# Altium PCB Relay_SW.PcbDoc
Units mm, origin at the board's own origin, x right, y up, seen from the top; angles counter-clockwise.
Board outline 139.45 x 113.98 mm, 2 copper layers (Top Layer, Bottom Layer); 60 components, 69 nets, 263 pads, 25 vias.
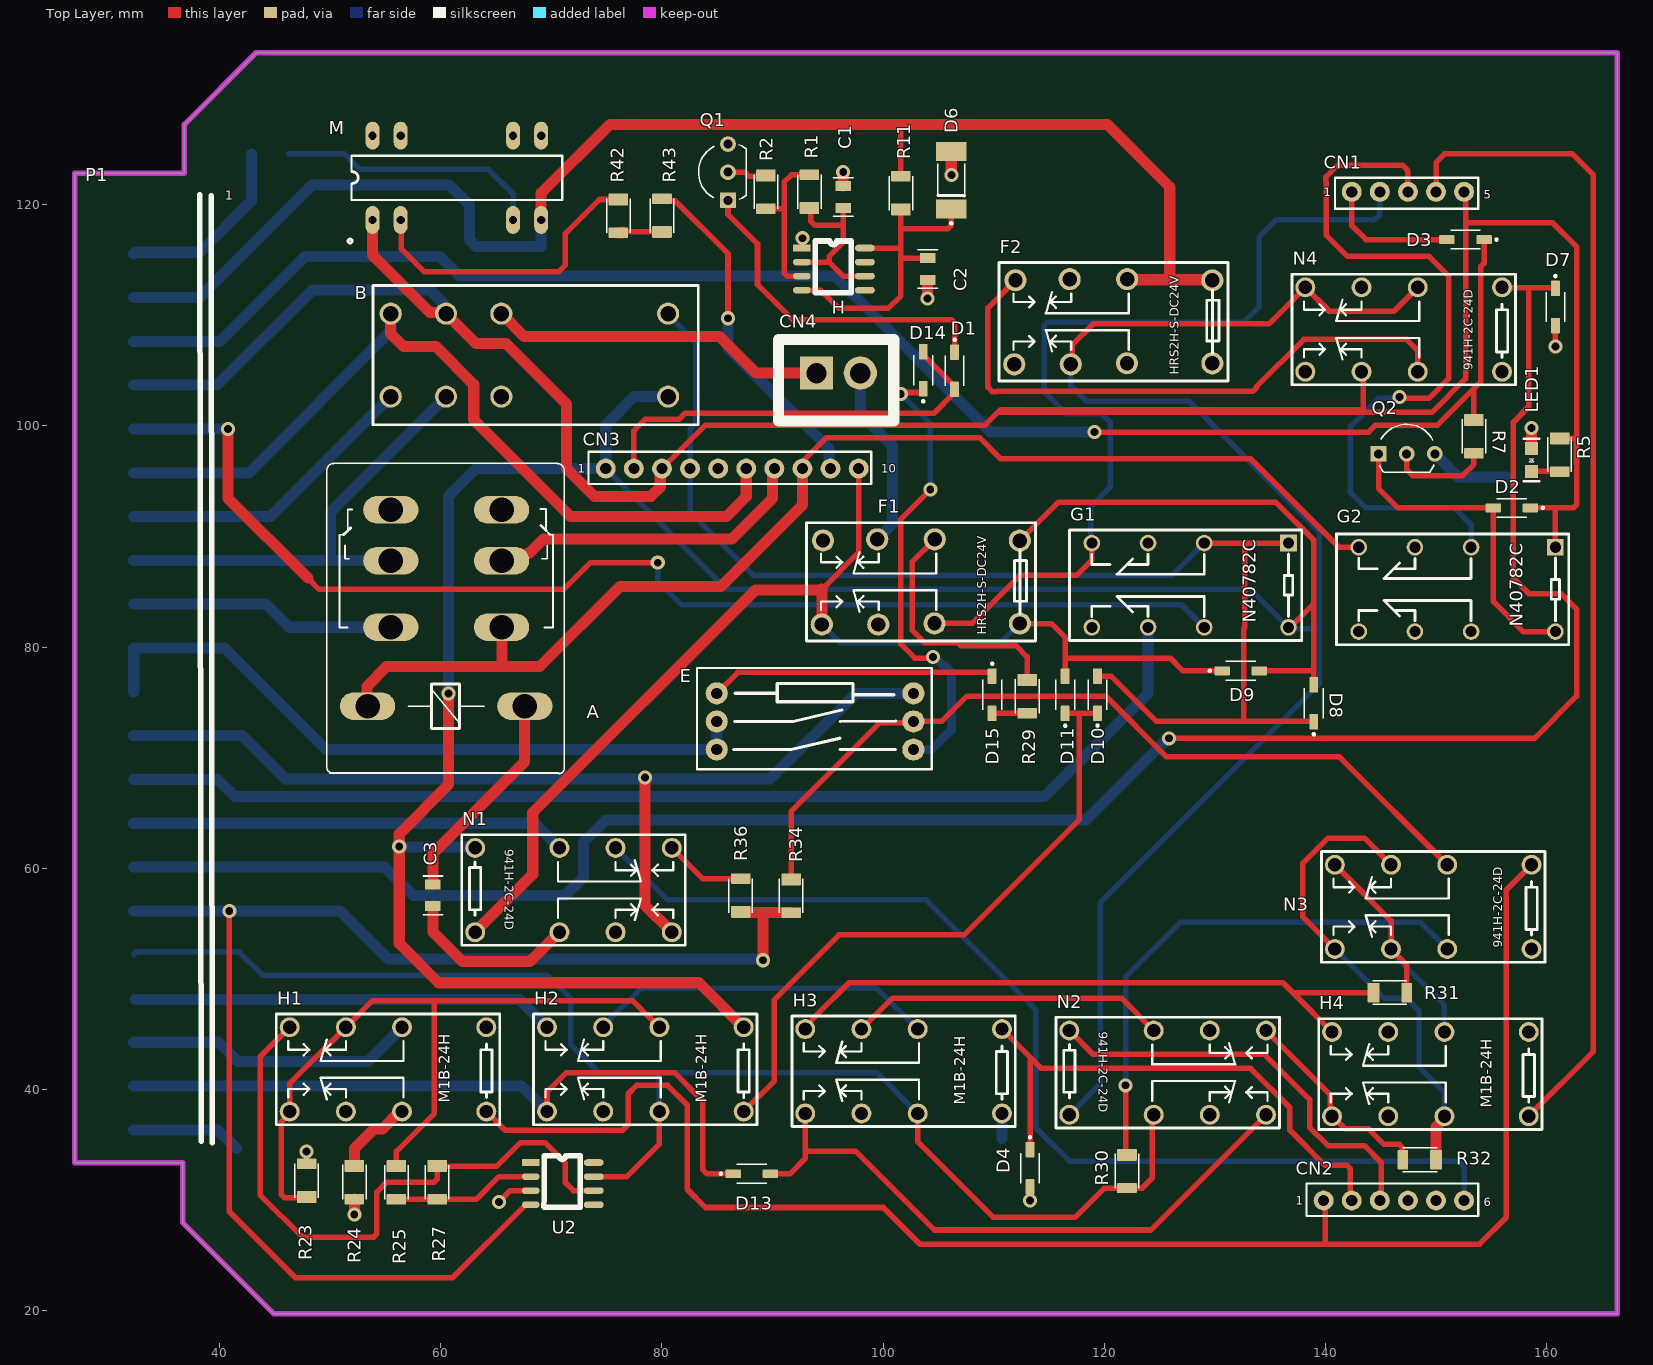
[diagram p0: Top Layer view]
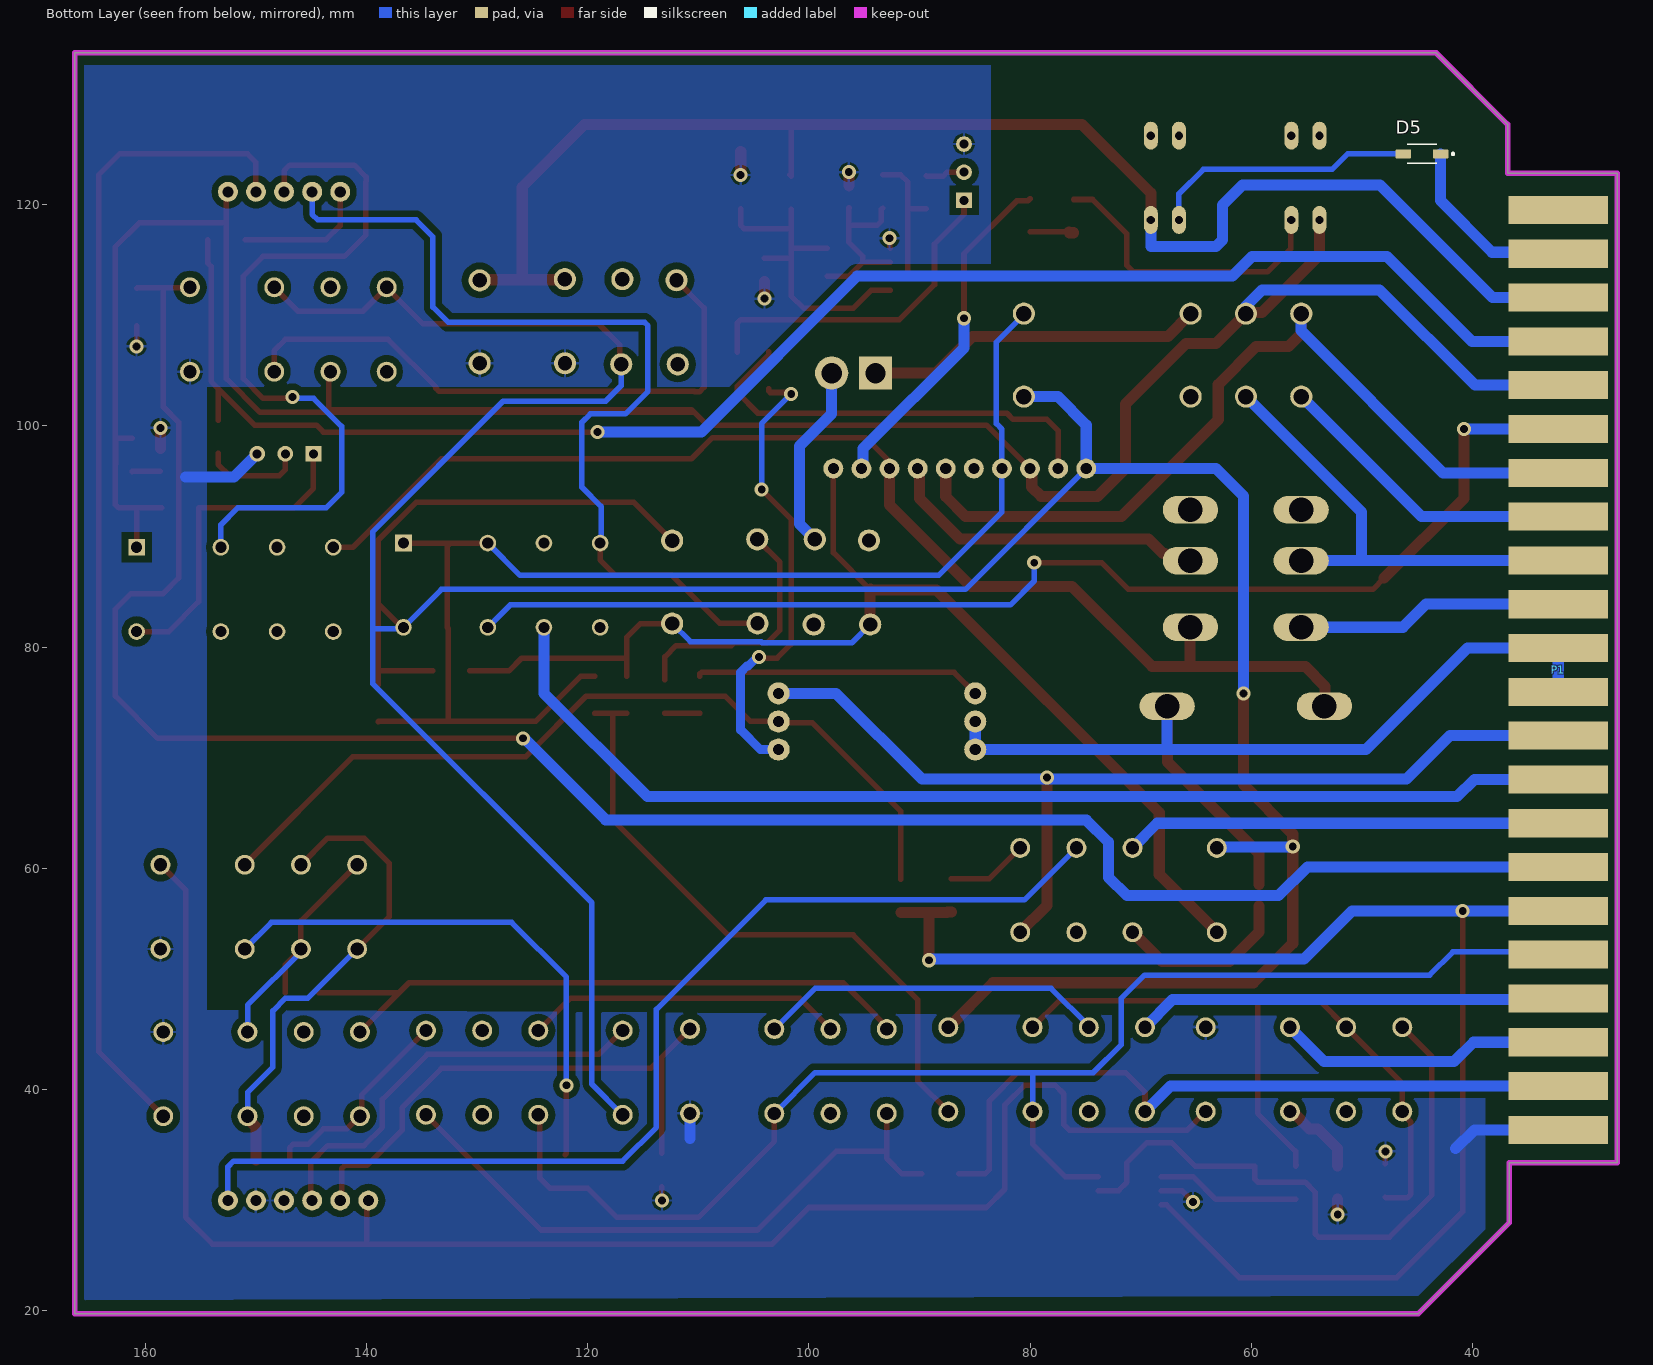
[diagram p1: Bottom Layer view, seen from below]
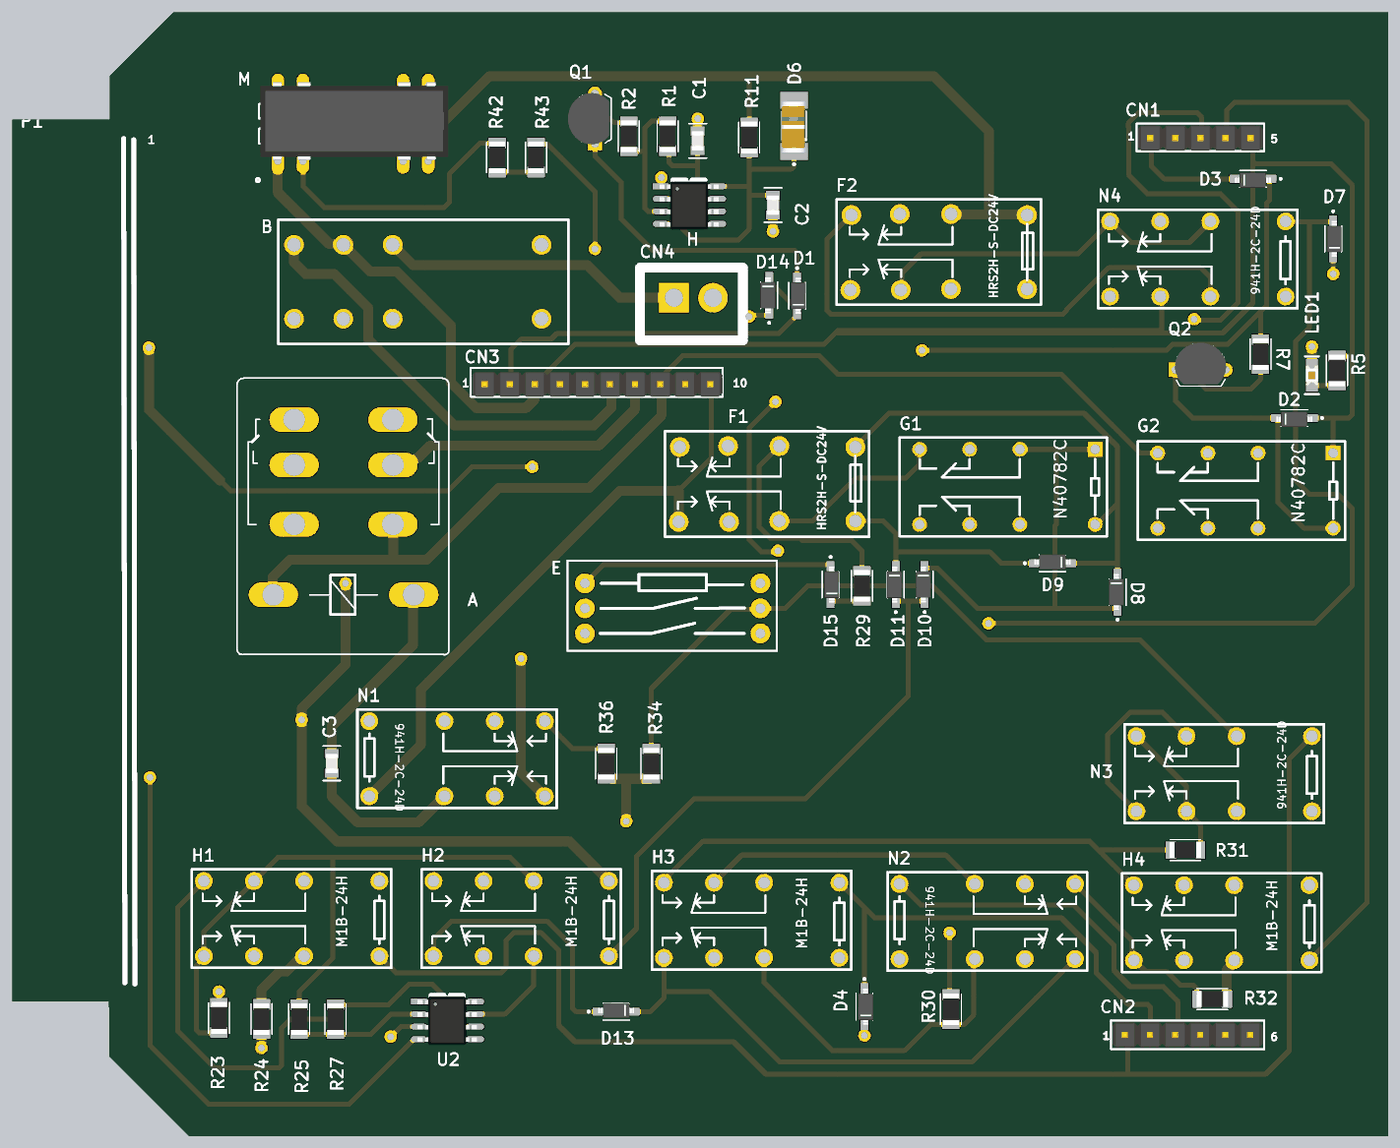
[diagram p2: 3D render of the assembled board from above, using the file's embedded part models]

## Layer stack, top to bottom
Top Solder: solder mask 0.0102, Solder Resist, Dk 3.5
Top Layer: signal copper 0.0356
Dielectric 1: dielectric 0.32, FR-4, Dk 4.8
Bottom Layer: signal copper 0.0356
Bottom Solder: solder mask 0.0102, Solder Resist, Dk 3.5

## Board outline
26.924,33.401 26.924,122.828 36.83,122.828 36.83,127.254 43.307,133.731 166.37,133.731 166.37,19.749 44.894,19.749 36.703,27.94 36.703,33.401

## Design rules (kind name [scope] priority, off if disabled: settings)
Clearance Clearance_2 [InNamedPolygon('GND_L02_P000')] p1: gap=0.6 ignorepadtopadclearanceinfootprint=FALSE
Clearance Clearance_1 [InNamedPolygon('GND_L02_P000')] p2: gap=0.254 ignorepadtopadclearanceinfootprint=FALSE except(0: Arc-Hole Track-Hole SMDPad-Hole THPad-Hole Via-Hole Fill-Hole Poly-Hole Region-Hole Text-Hole; 0.5: Arc-Arc Arc-Track Track-Track)
Clearance [All] p3: gap=0.4 ignorepadtopadclearanceinfootprint=FALSE
PolygonConnect [All] p1: connectstyle=Relief reliefconductorwidth=0.254 reliefentries=4 polygonreliefangle="90 Angle" airgapwidth=0.254
RoutingVias [All] p1: holewidth=0.711 width=1.27 viastyle="Through Hole" minholewidth=0.711 minwidth=1.27 maxholewidth=0.711 maxwidth=1.27
SilkToSolderMaskClearance [IsPad] p1: minsilkscreentomaskgap=0.1 clearancetoexposedcopper=TRUE
SolderMaskExpansion [All] p1: expansion=0.102 istentingtop=FALSE
Width [All] p1: maxlimit=2 minlimit=0.254 preferedwidth=1
29 further rules are at their usual default settings.

## Components (designator, comment, footprint, x,y, rotation, side; value= is the part's Value field where it differs from the comment)
A "OMRON_LY2" OMRON_LY2 60.507,74.66 r180 top
B "942H-2C-24DC" 942H-2C-24DC 68.027,106.398 r180 top
C1 "2.2uF" Cap0805 95.504,122.44 r270 top
C2 "10uF" Cap0805 104.912,112.427 r90 top
C3 "10uF" Cap0805 60.198,55.816 r90 top
CN1 "HDR5" HDR5_F 140.843,119.634 r0 top
CN2 "HDR6" HDR6_F 138.303,28.448 r0 top
CN3 "HDR10" HDR10_F 74.93,96.139 r0 top
CN4 "PWR_HDR_2P" PWR_HDR_2P 93.98,104.775 r0 top
D1 "" SOD-123 106.464,104.982 r270 top
D2 "1N4148" SOD-123 156.845,92.583 r180 top
D3 "" SOD-123 152.654,116.84 r180 top
D4 "1N4148" SOD-123 113.284,32.893 r270 top
D5 "" SOD-123 44.573,124.589 r0 bottom
D6 "ZM" Melf 106.156,122.208 r90 top
D7 "" SOD-123 160.782,110.744 r270 top
D8 "1N4148" SOD-123 138.938,74.93 r90 top
D9 "1N4148" SOD-123 132.334,77.851 r0 top
D10 "" SOD-123 119.38,75.702 r90 top
D11 "" SOD-123 116.459,75.692 r90 top
D13 "" SOD-123 88.138,32.385 r0 top
D14 "" SOD-123 103.632,105.029 r90 top
D15 "" SOD-123 109.855,75.692 r270 top
E "OL-C-212H" ol-c-212H 84.963,75.819 r0 top
F1 "HRS2H-S-DC24V" HRS2H-S-DC24V 103.412,85.891 r180 top
F2 "HRS2H-S-DC24V" HRS2H-S-DC24V 120.811,109.414 r180 top
G1 "N40782C12V0.2W" N40782CXXXXX 127.762,85.598 r180 top
G2 "N40782C12V0.2W" N40782CXXXXX 151.892,85.217 r180 top
H "NE555P" SOP8 95.504,114.173 r0 top
H1 "M1B-24H" M1B-24H 55.626,42.457 r180 top
H2 "M1B-24H" M1B-24H 78.888,42.457 r180 top
H3 "M1B-24H" M1B-24H 102.235,42.291 r180 top
H4 "M1B-24H" M1B-24H 149.86,42.037 r180 top
LED1 "---" "0805 LED" 158.623,96.901 r90 top
M "HE721R0510" HE721R0510 61.468,122.428 r90 top
N1 "941H-2C-24D" 941H-2C-24D 72.009,58.039 r0 top
N2 "941H-2C-24D" 941H-2C-24D 125.73,41.529 r0 top
N3 "941H-2C-24D" 941H-2C-24D 149.733,56.515 r180 top
N4 "941H-2C-24D" 941H-2C-24D 147.066,108.712 r180 top
P1 "PCI" PCI 32.258,119.517 r0 top
Q1 "BC337" TO92 85.979,122.936 r90 top
Q2 "BC337" TO92 147.335,97.477 r0 top
R1 "150k" Res1206 93.343,121.158 r90 top value=1K
R2 "12k" Res1206 89.408,121.158 r270 top value=1K
R5 "2K2" Res1206 161.163,97.409 r270 top value=1K
R7 "22K" Res1206 153.416,99.06 r270 top value=1K
R11 "650R" Res1206 101.6,121.031 r90 top value=1K
R23 "22k" Res1206 47.879,31.75 r90 top value=1K
R24 "6k8" Res1206 52.197,31.639 r270 top value=1K
R25 "22k" Res1206 56.007,31.623 r270 top value=1K
R27 "22k" Res1206 59.69,31.623 r270 top value=1K
R29 "800R" Res1206 113.03,75.565 r270 top value=1K
R30 "10K" Res1206 122.047,32.639 r270 top value=1K
R31 "33K" Res1206 145.796,48.768 r0 top value=1K
R32 "27k" Res1206 148.531,33.655 r180 top value=1K
R34 "10K" Res1206 91.694,57.531 r270 top value=1K
R36 "100K" Res1206 87.122,57.531 r90 top value=1K
R42 "100R" Res1206 76.073,118.999 r270 top value=1K
R43 "820R" Res1206 80.01,118.999 r90 top value=1K
U2 "OP07CP" SOP8 70.993,31.496 r0 top

## Footprints (in the part's own frame and the unit in brackets; to place one, negate y for a bottom-side part, rotate by r counter-clockwise, add the part's x,y. Pads: shape width x height; smd on the part's side, far side on the other; paste and mask are expansions set on the pad)
"0805 LED" [mm]
  rect 1.2x1.2 smd: 1(-1.016,0) 2(1.045,0)
  silkscreen extent -1.91,-0.71 1.93,0.71, body extent -1,-0.62 1,0.63, height 0.4
941H-2C-24D [mm]
  round 1.8 hole 1.2 paste+0 mask+0.051: 1(-8.89,-3.81) 4(-1.27,-3.81) 6(3.81,-3.81) 8(8.89,-3.81) 9(8.89,3.81) 11(3.81,3.81) 13(-1.27,3.81) 16(-8.89,3.81)
  silkscreen extent -10.1,-5 10.1,5
942H-2C-24DC [mm]
  round 2 hole 1.4 paste+0 mask+0.051: 1(-12.54,3.75) 2(2.54,3.75) 3(7.54,3.75) 4(12.54,3.75) 5(12.54,-3.75) 6(7.54,-3.75) 7(2.54,-3.75) 8(-12.539,-3.75)
  silkscreen extent -15.26,-6.3 14.14,6.3
Cap0805 [mm]
  rect 0.9x1.4 smd: 1(0.762,0.889) 2(2.73,0.889)
  silkscreen extent 0,0 3.49,1.78, body extent 0.74,0.26 2.74,1.51, height 0.81
HDR5_F [mm]
  round 1.8 hole 1: 1(1.524,1.524) 2(4.064,1.524) 3(6.604,1.524) 4(9.144,1.524) 5(11.684,1.524)
  silkscreen extent 0,0 12.95,2.79, body extent 0.13,0.07 12.83,2.61, height 9.5
HDR6_F [mm]
  round 1.8 hole 1: 1(1.524,1.524) 2(4.064,1.524) 3(6.604,1.524) 4(9.144,1.524) 5(11.684,1.524) 6(14.224,1.524)
  silkscreen extent -0.04,0.13 15.49,3.06, body extent 0.1,0.31 15.34,2.85, height 9.5
HDR10_F [mm]
  round 1.8 hole 1: 1(0,0) 2(2.54,0) 3(5.08,0) 4(7.62,0) 5(10.16,0) 6(12.7,0) 7(15.24,0) 8(17.78,0) 9(20.32,0) 10(22.86,0)
  silkscreen extent -1.56,-1.4 24,1.53, body extent -1.4,-1.4 24,1.14, height 9.5
HE721R0510 [mm]
  oval 2.516x1.258 hole 0.75: 1(-3.81,7.62) 2(-3.81,5.08) 6(-3.81,-5.08) 7(-3.81,-7.62) 8(3.81,-7.62) 9(3.81,-5.08) 13(3.81,5.08) 14(3.81,7.62)
  silkscreen extent -5.89,-9.53 2,9.83, body extent -3.68,-9.65 4.19,9.4, height 5.5
HRS2H-S-DC24V [mm]
  round 2 hole 1.3 paste+0 mask+0.051: 1(-8.952,-3.74) 2(-8.952,3.76) 3(-1.256,-3.849) 4(3.943,-3.849) 5(8.846,-3.75) 6(8.952,3.847) 7(3.844,3.849) 8(-1.236,3.75)
  silkscreen extent -10.36,-5.35 10.34,5.35
M1B-24H [mm]
  round 1.8 hole 1.2 paste+0 mask+0.051: 1(-8.509,-3.175) 4(-0.889,-3.175) 6(4.191,-3.175) 8(9.271,-3.175) 9(9.271,4.445) 11(4.191,4.445) 13(-0.889,4.445) 16(-8.509,4.445)
  silkscreen extent -9.72,-4.37 10.48,5.64
Melf [mm]
  rect 1.7x2.78 smd: A(2.6,0) C(-2.6,0)
  silkscreen extent -4,-1.23 1.5,1.23, body extent -2.7,-1.27 2.45,1.4, height 1.34
N40782CXXXXX [mm]
  rect 1.5x1.5 hole 1 paste+0 mask+0.051: 1(-8.89,-3.81)
  round 1.5 hole 1 paste+0 mask+0.051: 4(-1.27,-3.81) 6(3.81,-3.81) 8(8.89,-3.81) 9(8.89,3.81) 11(3.81,3.81) 13(-1.27,3.81) 16(-8.89,3.81)
  silkscreen extent -10.09,-5 10.92,5
ol-c-212H [mm]
  round 2 hole 1: 1(0,0) 2(17.78,0) 3(0,-2.54) 4(17.78,-2.54) 5(0,-5.08) 6(17.78,-5.08)
  silkscreen extent -1.78,-6.86 19.43,2.29
OMRON_LY2 [mil]
  oval 196.85x98.43 hole 87: 1(197,-699) 2(-197,-699) 3(197,-518) 4(-197,-518) 5(197,-281) 6(-197,-281) 7(280,0) 8(-280,0)
  silkscreen extent -420,-865 425,240
PCI [mm]
  rect 9x2.54 smd far side: 1(0,0) 2(0,-3.96) 3(0,-7.92) 4(0,-11.88) 5(0,-15.84) 6(0,-19.8) 7(0,-23.76) 8(0,-27.72) 9(0,-31.68) 10(0,-35.64) 11(0,-39.6) 12(0,-43.56) 13(0,-47.52) 14(0,-51.48) 15(0,-55.44) 16(0,-59.4) 17(0,-63.36) 18(0,-67.32) 19(0,-71.28) 20(0,-75.24) 21(0,-79.2) 22(0,-83.16)
  silkscreen extent 5.97,-84.33 7.11,1.4
PWR_HDR_2P [mm]
  rect 3x3 hole 1.85: 1(0,0)
  round 3 hole 1.85: 2(3.96,0)
  silkscreen extent -3.43,-4.32 6.98,3.05
Res1206 [mm]
  rrect14% 1.09x1.77 smd: 1(-1.465,0)
  rrect14% 0.94x1.77 smd: 2(1.54,0)
  silkscreen extent -1.55,-1.06 1.55,1.06, body extent -1.6,-0.8 1.6,0.8, height 0.6
SOD-123 [mm]
  rrect18% 1.4x0.8 smd: A(1.68,0) C(-1.68,0)
  silkscreen extent -2.9,-0.85 1.35,0.85, body extent -1.82,-0.65 1.83,0.9, height 1.44
SOP8 [mm]
  rect 1.6x0.6 smd: 1(-2.85,1.905)
  oval 1.6x0.6 smd: 2(-2.85,0.635) 3(-2.85,-0.635) 4(-2.85,-1.905)
  oval 1.8x0.6 smd: 5(2.85,-1.905) 6(2.85,-0.635) 7(2.85,0.635) 8(2.85,1.905)
  silkscreen extent -1.65,-2.13 1.63,2.54, body extent -2.98,-2.5 3.02,2.4, height 1.7
TO92 [mil]
  rect 56x56 / inner round 56 / far side rect 56x56 hole 32: 1(-100,0)
  round 56 hole 32: 2(0,0) 3(100,0)
  silkscreen extent -97,-65 97,105, body extent -102,-58 102,107, height 210

## Part data
A: Manufacturer=NF(福特), Manufacturer Part=N40782C12V0.2W, Contributor=lcsc, ID=114, Part Number=OMRON_LY2, spicePre=U, spiceSymbolName=N40782C12V0.2W, Supplier=LCSC, Supplier Part=C7473079
B: "Relay 2C 24VDC", Additionner=S.Pourmohammad, Category=Relay, ID=112, Part Number=942H-2C-24DC
C1: library part Cap-0805-2.2uF, "Cap 0805 2.2uF", Manufacturer=---, Adding Time=1401-05-15, Additionner=A.Abdolahzadeh, Category=Cap, Datasheet Path=---, ID=35, Part Number=Cap-0805-2.2uF, Sub-Category=Cer0805, Supplier="Ic Kala"
C2 C3: library part Cap-0805-10uF, "Cap 0805 10uF", Manufacturer=---, Adding Time=1401-05-17, Additionner=S.Pourmohammad, Category=Cap, Datasheet Path=---, ID=49, Part Number=Cap-0805-10uF, Sub-Category=Cer0805, Supplier="Ic Kala"
CN1: library part "PinHeader 5pin", "Pitch 2.54 mm 5PIN Femail", Manufacturer=---, Package=None, Adding Time=1402-10-1, Additionner=S.Pourmohammad, Availability=Unavailable, Category=Connector, Datasheet Path=---, ID=78, MP=HTSW-105-14-L-S, Part Number="PinHeader 5pin", Price=None, Sub-Category=Header
CN2: library part "PinHeader 6pin", "Pitch 2.54 mm", Manufacturer=---, Package=None, Adding Time=1402-10-1, Additionner=S.Pourmohammad, Availability=Unavailable, Category=Connector, Datasheet Path=---, ID=79, MP=HTSW-106-07-S-S, Part Number="PinHeader 6pin", Price=None, Sub-Category=Header
CN3: library part "PinHeader 10pin", "Pitch 2.54 mm", Manufacturer=---, Package=None, Adding Time=1402-10-1, Additionner=S.Pourmohammad, Availability=Unavailable, Category=Connector, Datasheet Path=---, ID=80, MP=HTSW-106-07-S-S, Part Number="PinHeader 10pin", Price=None, Sub-Category=Header
CN4: library part "Power Connector", "P-P= 3.96mm", Adding Time=1402-10-1, Additionner=S.Pourmohammad, Category=Connector, ID=83, Part Number="Power Connector", Sub-Category="Power Connector"
D1 D3 D5 D7 D10 D11 D13 D14 D15: library part 1N4148, "Diode Standard 75 V 300mA (DC) Through Hole DO-35 Mimi Melf", Package="AXIAL LEAD-2 ON Semiconductor", Adding Time=1402-10-1, Additionner=S.Pourmohammad, Availability="In Stock", Category=Diode, Check_prices=https://www.snapeda.com/parts/1N4148/Onsemi/view-part/?ref=eda, ID=113, MF="ON Semiconductor", MP=1N4148, Part Number=1N4148, Price=None, Purchase-URL=https://pricing.snapeda.com/search/part/1N4148/?ref=eda, SnapEDA_Link=https://www.snapeda.com/parts/1N4148/Onsemi/view-part/?ref=snap, Sub-Category=standard
D2 D4 D8 D9: "Diode Standard 75 V 300mA (DC) Through Hole DO-35 Mimi Melf", Package="AXIAL LEAD-2 ON Semiconductor", Adding Time=1402-10-1, Additionner=S.Pourmohammad, Availability="In Stock", Category=Diode, Check_prices=https://www.snapeda.com/parts/1N4148/Onsemi/view-part/?ref=eda, ID=113, MF="ON Semiconductor", MP=1N4148, Part Number=1N4148, Price=None, Purchase-URL=https://pricing.snapeda.com/search/part/1N4148/?ref=eda, SnapEDA_Link=https://www.snapeda.com/parts/1N4148/Onsemi/view-part/?ref=snap, Sub-Category=standard
D6: "Zener Diode Melf", Package="DO-213 STMicroelectronics", Additionner=S.Pourmohammad, Availability="Not in stock", Category=Diode, Check_prices=https://www.snapeda.com/parts/TMMBAT41/STMicroelectronics/view-part/2894620/?ref=eda, ID=132, MF=STMicroelectronics, MP=TMMBAT41, Part Number=ZM, Price=None, SnapEDA_Link=https://www.snapeda.com/parts/TMMBAT41/STMicroelectronics/view-part/2894620/?ref=snap, Sub-Category=Zener
E: "REED RELAY  2 Contact", Adding Time=1402-10-1, Additionner=S.Pourmohammad, Category=Relay, ID=130, Part Number=OL-C-212H, Sub-Category="RELAY REED SPDT", Supplier=……..
F1 F2: JLCPCB Part Class="Extended Part", Manufacturer=HKE(汇港), Manufacturer Part=HRS2H-S-DC24V, spicePre=K, spiceSymbolName=HRS2H-S-DC24V, Supplier=LCSC, Supplier Part=C12249
G1 G2: library part N40782C24V0.2W, Manufacturer=NF(福特), Contributor=lcsc, Manufacturer Part=N40782C12V0.2W, spicePre=U, spiceSymbolName=N40782C12V0.2W, Supplier=LCSC, Supplier Part=C7473079
H: "Astable or Monostable Operation", Manufacturer=TI, Adding Time=1402-10-1, Additionner=S.Pourmohammad, Category=IC, ID=115, Part Number=NE555P, Sub-Category=Timer
LED1: library part 598-8110-107F, "LED 0805 Red 635nm, Forward Current: 20mA, Forward Voltage: 1.7V", Manufacturer=Dialight, Adding Time=1400-09-14, Additionner=M.Moghimi, Category=LED, Datasheet Path=Datasheets\LED-Dialight-598Series.PDF, ID=22, Part Number=598-8110-107F, Sub-Category=SMD-0805
M: "RELAY REED SPDT 250MA 5V", Manufacturer=Littelfuse_Inc, Package=None, Adding Time=1402-10-1, Additionner=S.Pourmohammad, Category=Relay, Datasheet Path=D:\Project\metal\datasheet\HE721R0510_Littelfuse_Inc..pdf, Digi-Key_Part_Number=F11467-ND, Digi-Key_Purchase_URL=https://www.digikey.com/product-detail/en/littelfuse-inc/HE721R0510/F11467-ND/4780712?utm_source=snapeda&utm_medium=aggregator&utm_campaign=symbol, ID=110, MF="Littelfuse Inc.", MP=HE721R0510, Part Number=HE721R0510, SnapEDA_Link=https://www.snapeda.com/parts/HE721R0510/Littelfuse%20Inc./view-part/1739461/?ref=snap, Sub-Category="RELAY REED SPDT", Supplier=skytech
N1 N2 N3 N4: JLCPCB Part Class="Extended Part", Manufacturer=欣大, Contributor=LCSC, Manufacturer Part=941H-2C-24D, spicePre=K, spiceSymbolName=941H-2C-24D, Supplier=LCSC, Supplier Part=C259271
P1: "normal PAD for SPARK project", Adding Time=1402-10-1, Additionner=S.Pourmohammad, Category=Connector, ID=81, Part Number=PCI, Sub-Category=PCI
Q1 Q2: "Transistor", Manufacturer=Diodes-Incorporated, Adding Time=1402-10-1, Additionner=S.Pourmohammad, Category=Transistor, ID=118, Part Number=BC337, Sub-Category=BJT-NPN, Supplier="Ic Kala"
R1: library part Res-1206-150K, "Resistor 1206 150 Kohm", Adding Time=1402-10-1, Additionner=S.Pourmohammad, Category=Res, ID=72, Part Number=Res-1206-150K, Sub-Category=SMD-1206, Supplier="Ic Kala"
R2: library part Res-1206-12K, "Resistor 1206 12 Kohm", Adding Time=1402-10-1, Additionner=S.Pourmohammad, Category=Res, ID=68, Part Number=Res-1206-12K, Sub-Category=SMD-1206, Supplier="Ic Kala"
R5: library part Res-1206-2K2, "Resistor 1206 2.2 Kohm", Adding Time=1402-10-1, Additionner=S.Pourmohammad, Category=Res, ID=82, Part Number=Res-1206-2K2, Sub-Category=SMD-1206, Supplier="Ic Kala"
R7 R23 R25 R27: library part Res-1206-22K, "Resistor 1206 22 Kohm", Adding Time=1402-10-1, Additionner=S.Pourmohammad, Category=Res, ID=69, Part Number=Res-1206-22K, Sub-Category=SMD-1206, Supplier="Ic Kala"
R11: library part Res-1206-650R, "Resistor 1206 650 ohm", Adding Time=1402-10-1, Additionner=S.Pourmohammad, Category=Res, ID=73, Part Number=Res-1206-650R, Sub-Category=SMD-1206, Supplier="Ic Kala"
R24: library part Res-1206-6K8, "Resistor 1206 6.8 Kohm", Adding Time=1402-10-1, Additionner=S.Pourmohammad, Category=Res, ID=67, Part Number=Res-1206-6K8, Sub-Category=SMD-1206, Supplier="Ic Kala"
R29: library part Res-1206-800R, "Resistor 1206 800 ohm", Adding Time=1402-10-1, Additionner=S.Pourmohammad, Category=Res, ID=76, Part Number=Res-1206-800R, Sub-Category=SMD-1206, Supplier="Ic Kala"
R30 R34: library part Res-1206-10K, "Resistor 1206 10 Kohm", Manufacturer=---, Adding Time=1402-10-1, Additionner=S.Pourmohammad, Category=Res, Datasheet Path=---, ID=66, Part Number=Res-1206-10K, Sub-Category=SMD-1206, Supplier="Ic Kala"
R31: library part Res-1206-33K, "Resistor 1206 33 Kohm", Adding Time=1402-10-1, Additionner=S.Pourmohammad, Category=Res, ID=71, Part Number=Res-1206-33K, Sub-Category=SMD-1206, Supplier="Ic Kala"
R32: library part Res-1206-27K, "Resistor 1206 27 Kohm", Adding Time=1402-10-1, Additionner=S.Pourmohammad, Category=Res, ID=70, Part Number=Res-1206-27K, Sub-Category=SMD-1206, Supplier="Ic Kala"
R36: library part Res-1206-100K, Manufacturer=---, Adding Time=1402-09-24, Additionner=A.Abdolahzadeh, Category=Res, Datasheet Path=---, ID=96, Part Number=Res-1206-100K, Sub-Category=SMD-1206
R42: library part Res-1206-100R, "Resistor 1206 100 ohm", Adding Time=1402-10-1, Additionner=S.Pourmohammad, Category=Res, ID=75, Part Number=Res-1206-100R, Sub-Category=SMD-1206, Supplier="Ic Kala"
R43: library part Res-1206-820R, "Resistor 1206 820 ohm", Adding Time=1402-10-1, Additionner=S.Pourmohammad, Category=Res, ID=77, Part Number=Res-1206-820R, Sub-Category=SMD-1206, Supplier="Ic Kala"
U2: "OPAMP", JLCPCB Part Class="Extended Part", Manufacturer=TI, Adding Time=1402-10-1, Additionner=S.Pourmohammad, Category=IC, ID=116, Manufacturer Part=OP07CP, Part Number=OP07CP, spicePre=X, spiceSymbolName=OP07CP, Sub-Category=OPAMP, Supplier=LCSC, Supplier Part=C5224

## Via types
v1: diameter 1.27, hole 0.711, Top Layer to Bottom Layer, 25 vias

## Nets (pads, with @x,y where several pads share a name; then routed paths per layer and width w, separated by ;. In a path a pad name is that pad's centre, name@x,y a point inside that pad or via, vN(x,y) a via of type N, cw(c..) or ccw(c..) an arc to the next point about the centre after c; other vN are vias at no path point)
GND: C1.1 C2.1 CN2.4 CN2.5 D4.A D6.A D7.A F2.2 F2.8 H1.1 H3.16 H4.1 H.1 LED1.2 N3.16 N4.16 P1.22 Q1.3 Q2.3 R23.2 R24.2 U2.3 | length 36.2
  Top Layer w0.5: R23.2 v1(47.879,34.417) ; v1(65.278,29.845) 66.294,30.861 U2.3 ; H.1 92.66,116.078 92.71,116.128 v1(92.71,116.967) ; v1(113.284,29.972) D4.A ; v1(160.782,107.188) D7.A
  Top Layer w1: v1(52.197,28.702) R24.2 ; C1.1 v1(96.393,122.936) ; v1(104.013,111.506) C2.1@104.013,113.027 ; D6.A 106.164,124.8 106.164,122.69 v1(106.172,122.682) ; LED1.2 v1(158.623,99.822)
  Bottom Layer w1: P1.22 39.843,36.357 41.529,34.671 ; 110.744,35.56 H3.16 ; Q2.3 151.974,95.377 156.344,95.377
NetA_4: A.4 CN3.7 | length 28.6
  Top Layer w1: A.4@66.706,87.357 67.828,88.48 67.987,88.48 69.297,89.789 86.36,89.789 90.017,93.446 90.017,95.986 CN3.7
NetA_6: A.6 A.7 CN3.8 G2.8 | length 110.8
  Top Layer w0.5: CN3.8 92.959,96.388 92.959,97.023 94.869,98.933 108.712,98.933 110.617,97.028 133.223,97.028 141.224,89.027 G2.8
  Top Layer w1: A.7 53.34,74.715 53.34,76.454 55.118,78.232 65.532,78.232 ; A.6 65.532,81.776 65.532,78.232 ; CN3.8 92.71,92.837 85.344,85.471 76.2,85.471 68.961,78.232 65.532,78.232
NetB_1: B.1 CN3.1 D8.A D9.A F1.1 F2.7 G1.16 H2.1 N1.16 N2.1 N4.4 N4.8 | length 359.5
  Top Layer w0.5: F1.1 115.824,93.091 135.509,93.091 138.938,89.662 138.938,83.947 ; F2.7 117.094,105.692 117.094,107.315 118.999,109.22 134.874,109.22 N4.8 140.335,110.363 146.177,110.363 N4.4 ; D9.A 138.938,77.851 ; G1.16 136.779,81.788 138.938,83.947 ; D8.A 138.938,77.851 ; 138.938,77.851 138.938,83.947
  Top Layer w1: v1(60.706,75.819) 60.706,67.564 56.261,63.119 v1(56.261,61.976) 56.261,53.213 59.817,49.657 83.372,49.657 H2.1 H2.1@87.464,45.632
  Bottom Layer w0.5: CN3.1 85.852,85.217 133.223,85.217 G1.16 136.779,81.661 139.446,81.661 ; N2.1 119.634,40.513 119.634,56.896 139.446,76.708 139.446,81.661 ; F2.7 116.967,103.632 118.364,102.235 127.635,102.235 139.446,90.424 139.446,81.661
  Bottom Layer w1: v1(56.261,61.976) 56.313,61.924 63.044,61.924 N1.16 ; v1(60.706,75.819) 60.706,93.653 63.192,96.139 CN3.1 74.93,100.076 77.502,102.648 B.1
NetB_7: B.7 CN4.1 | length 30.7
  Top Layer w1: B.7 67.557,108.077 85.217,108.077 88.519,104.775 CN4.1
NetB_8: B.8 CN3.4 D8.C D10.A G1.1 G1.4 | length 114.4
  Top Layer w0.5: D10.A 120.611,77.382 124.714,73.279 132.588,73.279 ; G1.4 132.422,89.408 132.461,89.369 ; G1.1 132.461,89.408 132.461,89.369 ; D8.C 138.909,73.279 132.588,73.279 ; 132.461,89.369 132.715,89.115 132.715,81.788 132.588,81.661 132.588,73.279
  Bottom Layer w0.5: B.8 80.566,110.061 83.058,107.569 83.058,100.203 82.55,99.695 CN3.4 82.55,92.202 88.265,86.487 126.111,86.487 G1.4
NetC1_2: C1.2 H.2 H.6 R1.1 | length 16
  Top Layer w0.5: H.2 95.123,114.808 ; R1.1 93.472,119.564 93.472,118.491 93.815,118.148 96.393,118.148 ; C1.2@96.364,119.739 C1.2 96.393,118.148 ; H.6 96.393,113.538 95.123,114.808 ; 95.123,114.808 95.123,115.316 96.393,116.586 96.393,118.148
NetC3_1: C3.1 N1.4 | length 16
  Top Layer w1: C3.1 59.309,54.229 61.976,51.562 68.072,51.562 N1.4
NetCN1_1: CN1.1 D3.A | length 12.2
  Top Layer w0.5: CN1.1 142.367,118.11 143.637,116.84 D3.A
NetCN1_2: CN1.2 F1.8 G1.8 | length 83.1
  Top Layer w0.5: F1.8 108.049,82.141 112.395,86.487 117.475,86.487 118.872,87.884 G1.8
  Bottom Layer w0.5: G1.8 118.779,89.501 118.779,92.71 120.523,94.454 120.523,100.33 119.761,101.092 116.586,101.092 114.554,103.124 114.554,109.054 114.847,109.347 132.588,109.347 133.985,110.744 133.985,117.094 135.509,118.618 144.399,118.618 144.907,119.126 CN1.2
NetCN1_3: CN1.3 G2.4 | length 68
  Top Layer w0.5: v1(146.685,102.612) 146.808,102.489 149.352,102.489 151.13,104.267 151.13,113.538 149.352,115.316 141.986,115.316 140.081,117.221 140.081,122.047 140.034,122.094 140.034,122.508 141.097,123.571 146.939,123.571 147.447,123.063 CN1.3
  Bottom Layer w0.5: v1(146.685,102.612) 146.562,102.489 144.78,102.489 142.24,99.949 142.24,93.98 143.637,92.583 151.638,92.583 153.162,91.059 G2.4
NetCN1_4: CN1.4 H4.16 | length 105.5
  Top Layer w0.5: CN1.4 149.987,123.825 150.749,124.587 162.306,124.587 164.211,122.682 164.211,43.434 H4.16
NetCN2_1: CN2.1 H1.16 N3.1 | length 144.4
  Top Layer w0.5: H1.16 65.825,36.322 76.454,36.322 76.962,36.83 76.962,39.624 77.724,40.386 80.518,40.386 82.296,38.608 82.296,30.988 83.947,29.337 100.013,29.337 103.315,26.035 139.954,26.035 ; CN2.1 139.954,29.845 139.954,26.035 ; N3.1 156.337,58.039 156.337,28.448 153.924,26.035 139.954,26.035
NetCN2_2: CN2.2 D4.C H3.1 | length 49.5
  Top Layer w0.5: H3.1 113.284,42.926 ; D4.C@113.284,34.257 113.284,42.926 ; CN2.2 142.24,30.099 142.24,32.854 141.947,33.147 139.954,33.147 136.779,36.322 136.779,38.354 133.223,41.91 114.3,41.91 114.173,42.037 113.284,42.926
NetCN2_3: CN2.3 N2.16 | length 38.1
  Top Layer w0.5: N2.16 118.999,43.18 134.493,43.18 138.557,39.116 138.557,36.576 140.208,34.925 143.51,34.925 145.034,33.401 145.034,30.099 CN2.3
NetCN2_6: CN2.6 N1.11 | length 97.9
  Bottom Layer w0.5: N1.11 80.518,57.15 103.886,57.15 113.792,47.244 113.792,36.576 116.84,33.528 152.019,33.528 152.527,33.02 CN2.6
NetCN3_2: CN3.2 D1.A D14.A | length 38.7
  Top Layer w0.5: CN3.2 77.47,99.568 78.486,100.584 81.534,100.584 82.094,101.144 104.605,101.144 106.464,103.002 106.464,103.602 103.806,106.259 103.782,106.259 103.632,106.409 D14.A
NetCN3_9: CN3.9 R43.2 | length 31.3
  Top Layer w0.5: R43.2 80.199,120.35 81.199,120.35 85.979,115.57 v1(85.979,109.728)
  Bottom Layer w1: v1(85.979,109.728) 85.979,107.061 95.097,97.943 95.097,96.292 CN3.9
NetCN3_10: CN3.10 D9.C D11.A F1.2 F1.6 N1.1 | length 105.2
  Top Layer w0.5: 94.416,85.173 97.79,88.547 CN3.10 ; F1.2@112.395,82.161 F1.2 115.227,82.131 116.459,80.899 116.459,79.136 ; D11.A 116.459,79.136 ; D9.C 127.127,77.851 125.984,78.994 116.601,78.994 116.459,79.136
  Top Layer w1: N1.1 68.326,59.436 68.326,65.024 88.475,85.173 94.416,85.173 ; 94.416,85.261 94.46,85.217 F1.6
  Bottom Layer w0.5: F1.6 96.113,80.392 104.229,80.392 104.328,80.491 110.725,80.491 F1.2
NetCN4_2: CN4.2 F1.4 | length 16.8
  Bottom Layer w1: CN4.2 97.94,101.069 100.838,98.171 100.838,91.11 F1.4
NetD1_C: D1.C Q1.1 | length 30.6
  Top Layer w0.5: Q1.1 85.979,119.126 88.646,116.459 88.646,112.776 91.821,109.601 106.171,109.601 106.464,109.308 D1.C
NetD2_A: D2.A G2.16 Q2.1 | length 29.4
  Top Layer w0.5: Q2.1 144.795,94.346 146.558,92.583 D2.A 155.165,84.103 157.861,81.407 G2.16
NetD10_C: D10.C D11.C H2.16 | length 58.2
  Top Layer w0.5: H2.16 90.17,40.784 90.17,48.133 96.012,53.975 107.315,53.975 117.729,64.389 117.729,73.827 117.92,74.017 ; D11.C 116.464,74.017 117.729,74.017 117.92,74.017 ; D10.C 119.375,74.017 117.92,74.017
NetD13_A: D13.A H3.9 N2.8 | length 56.8
  Top Layer w0.5: D13.A 91.567,32.385 92.964,33.782 92.964,34.671 ; H3.9 92.964,34.671 ; N2.8 124.206,27.305 104.648,27.305 97.536,34.417 93.218,34.417 92.964,34.671
NetD14_C: D14.C E.6 | length 42.3
  Top Layer w0.5: v1(101.6,102.87) 101.747,103.017 103.482,103.017 103.632,103.167 D14.C ; v1(104.267,94.234) 101.6,91.567 101.6,80.264 102.865,78.999 104.399,78.999 v1(104.521,79.121)
  Bottom Layer w0.5: v1(101.6,102.87) 104.267,100.203 v1(104.267,94.234)
  Bottom Layer w0.8: E.6 104.394,70.739 106.172,72.517 106.172,77.724 105.606,78.29 105.479,78.29 104.648,79.121 v1(104.521,79.121)
NetD15_A: D15.A R29.2 | length 3.2
  Top Layer w0.5: D15.A@109.849,74.019 D15.A 109.861,74.019 113.024,74.019 R29.2 R29.2@113.036,74.019
NetD15_C: D15.C E.1 | length 25.9
  Top Layer w0.5: E.1 86.868,77.724 109.705,77.724 109.855,77.574 D15.C
NetE_4: E.4 N3.4 R34.1 | length 76.1
  Top Layer w0.5: R34.1 91.694,65.151 99.695,73.152 102.616,73.152 E.4 105.283,73.279 107.569,75.565 120.131,75.565 125.592,70.104 ; 125.603,70.093 125.592,70.104 ; N3.4 141.224,70.104 125.592,70.104
NetF1_3: F1.3 R29.1 | length 22.6
  Top Layer w0.5: F1.3 102.616,87.688 102.616,81.534 103.744,80.406 106.748,80.406 107.017,80.137 112.014,80.137 113.03,79.121 R29.1
NetF2_5: F2.5 N4.13 | length 54.1
  Top Layer w0.5: F2.5 109.474,110.673 109.474,103.505 109.902,103.077 110.316,103.077 110.363,103.124 133.438,103.124 133.731,103.417 133.731,103.505 138.049,107.823 147.32,107.823 148.336,106.807 N4.13
NetH1_6: H1.6 H1.9 H2.4 R23.1 R25.1 | length 66.8
  Top Layer w0.5: R23.1 47.82,30.226 45.886,30.226 45.593,30.519 45.593,37.069 46.355,37.831 46.355,40.552 H1.6 53.848,48.045 59.436,48.045 ; R25.1@55.948,33.147 R25.1 56.007,34.417 59.436,37.846 59.436,48.045 ; H2.4 77.364,48.045 59.436,48.045
NetH1_8: H1.8 R27.1 U2.6 | length 57.2
  Top Layer w0.5: H1.8 43.688,42.965 43.688,30.48 47.498,26.67 53.936,26.67 54.229,26.963 54.229,30.734 55.118,31.623 59.397,31.623 59.69,31.916 R27.1 65.092,33.088 67.183,35.179 69.469,35.179 71.247,33.401 71.247,31.623 72.009,30.861 U2.6
NetH1_13: H1.13 R24.1 | length 7.3
  Top Layer w1: R24.1 52.197,34.671 53.97,36.444 54.731,36.444 56.299,38.012 H1.13
NetH2_6: H2.6 H3.4 | length 31.5
  Bottom Layer w0.5: H2.6 74.697,45.741 78.105,49.149 99.441,49.149 H3.4
NetH3_6: H3.6 N2.13 | length 28.8
  Top Layer w0.5: H3.6 100.838,48.26 121.539,48.26 N2.13
NetH3_8: H3.8 H4.8 R31.1 | length 58.6
  Top Layer w0.5: H3.8 92.964,45.682 93.98,46.698 93.98,46.736 96.901,49.657 108.458,49.657 136.144,49.657 137.033,48.768 ; H4.8 137.033,48.768 ; R31.1 137.033,48.768
NetH4_4: H4.4 N3.8 N3.11 R31.2 | length 23.7
  Top Layer w0.5: N3.8 145.923,55.245 N3.11 147.336,51.292 R31.2
  Bottom Layer w0.5: N3.11 145.923,52.451 150.749,47.625 H4.4
NetH4_9: H4.9 N2.9 R32.2 | length 18.9
  Top Layer w0.5: N2.9 138.43,41.529 140.436,39.523 140.436,37.745 H4.9 140.636,37.592 141.779,36.449 143.891,36.449 145.288,35.052 146.646,35.052 146.939,34.759 146.939,33.707 R32.2
NetH4_13: H4.13 N3.6 N3.9 R32.1 | length 43.6
  Top Layer w0.5: N3.9 137.922,55.626 137.922,60.452 140.208,62.738 143.51,62.738 N3.6
  Top Layer w1: R32.1 149.996,36.623 150.749,37.376 H4.13
  Bottom Layer w0.5: N3.9 145.288,48.26 147.32,48.26 148.463,47.117 148.463,42.037 150.749,39.751 H4.13
NetH_3: H.3 R1.2 R2.2 | length 14.2
  Top Layer w0.5: R2.2 90.948,119.618 91.059,119.507 ; H.3 91.352,113.538 91.059,113.831 91.059,119.507 ; R1.2@93.345,122.698 91.71,122.698 91.059,122.047 91.059,119.507
NetLED1_1: LED1.1 R5.2 | length 2.5
  Top Layer w0.5: LED1.1 158.631,95.877 161.155,95.877 R5.2
NetM_2: M.2 R42.1 | length 27.5
  Top Layer w0.5: M.2 56.437,118.569 56.437,116.029 58.547,113.919 70.661,113.919 71.247,114.505 71.247,117.348 74.363,120.464 R42.1
NetN1_9: N1.9 R36.2 | length 7.4
  Top Layer w0.5: N1.9 83.677,59.071 R36.2
NetN3_13: N3.13 R30.1 | length 48.2
  Top Layer w0.5: v1(121.92,40.386) 121.92,34.231 R30.1
  Bottom Layer w0.5: v1(121.92,40.386) 121.92,50.165 126.873,55.118 148.59,55.118 N3.13
NetQ1_2: Q1.2 R2.1 | length 3.6
  Top Layer w0.5: Q1.2 87.503,122.936 87.884,122.555 89.34,122.555 R2.1
NetQ2_2: Q2.2 R7.2 | length 9.2
  Top Layer w0.5: Q2.2 147.356,97.456 147.356,96.015 147.867,95.504 152.4,95.504 153.416,96.52 R7.2
NetR25_2: R25.2 R27.2 U2.2 | length 13
  Top Layer w0.5: R25.2 57.848,30.083 R27.2 63.23,30.083 65.278,32.131 U2.2
NetR42_2: R42.2 R43.1 | length 4
  Top Layer w0.5: R42.2@76.503,117.534 R43.1
  Top Layer w1: R42.2 76.428,117.459 R42.2@76.503,117.534
PAD02: D5.C P1.2 | length 16.9
  Bottom Layer w1: P1.2 32.398,115.697 38.227,115.697 42.897,120.367 42.897,124.585 D5.C
PAD03: F2.1 F2.3 M.7 P1.3 R11.2 | length 132.8
  Top Layer w0.5: R11.2@101.727,122.698 R11.2 101.6,127.127 101.727,127.254
  Top Layer w1: M.7 69.088,121.031 75.311,127.254 101.727,127.254 120.269,127.254 125.915,121.608 125.915,113.209 ; F2.3@122.122,113.209 125.915,113.209 ; F2.1@129.709,113.209 125.915,113.209
  Bottom Layer w1: P1.3 38.191,111.597 48.387,121.793 60.788,121.793 62.611,119.97 62.611,116.791 63.197,116.205 69.088,116.205 M.7 ; F2.1@129.709,113.209 F2.1
PAD04: D3.C P1.4 R7.1 | length 149.2
  Top Layer w0.5: v1(119.126,99.441) 143.891,99.441 144.526,100.076 150.114,100.076 153.416,103.378 ; R7.1 153.416,103.378 ; D3.C 154.334,114.71 154.051,114.427 154.051,104.013 153.416,103.378
  Bottom Layer w1: P1.4 40.073,107.637 47.752,115.316 59.944,115.316 61.722,113.538 95.631,113.538 109.728,99.441 v1(119.126,99.441)
PAD05: B.6 CN1.5 CN3.3 D2.C G2.1 M.1 N4.11 P1.5 R5.1 | length 249.8
  Top Layer w0.5: CN3.3@79.857,95.986 CN3.3 83.947,100.076 109.22,100.076 110.363,101.219 ; 143.401,101.469 110.613,101.469 110.363,101.219 ; 143.401,101.473 N4.11@143.401,104.757 ; CN1.5@152.654,121.031 152.654,118.618 ; D2.C 160.909,92.583 ; G2.1 160.782,92.456 160.909,92.583 ; R5.1 162.636,98.874 162.695,98.933 162.695,116.197 160.528,118.364 152.908,118.364 152.654,118.618 ; 162.687,98.925 162.687,96.581 162.698,96.57 162.698,92.887 162.394,92.583 160.909,92.583 ; 110.363,101.219 149.606,101.219 152.654,104.267 152.654,118.618
  Top Layer w1: M.1 53.848,115.443 59.047,110.244 60.39,110.244 B.6 63.192,107.442 65.913,107.442 71.374,101.981 71.374,96.139 73.914,93.599 78.994,93.599 79.857,94.462 CN3.3@79.857,95.986 ; N4.11 N4.11@143.401,104.757 ; CN1.5 CN1.5@152.654,121.031
  Bottom Layer w1: P1.5 39.796,103.677 48.403,112.284 59.059,112.284 B.6@60.532,110.811 ; CN1.5@152.4,121.285 CN1.5
PAD06: G1.13 P1.6 | length 110.8
  Top Layer w0.5: 48.006,86.233 49.022,85.217 71.12,85.217 73.533,87.63 v1(79.629,87.63)
  Top Layer w1: v1(40.789,99.717) 40.789,93.45 48.006,86.233
  Bottom Layer w0.5: v1(79.629,87.63) 79.629,85.979 81.788,83.82 127,83.82 G1.13
  Bottom Layer w1: P1.6 v1(40.789,99.717)
PAD07: B.5 CN3.6 P1.7 | length 76.1
  Top Layer w1: B.5 55.487,108.343 56.642,107.188 59.563,107.188 62.992,103.759 62.992,100.584 71.755,91.821 85.852,91.821 87.63,93.599 CN3.6
  Bottom Layer w1: P1.7 42.671,95.757 55.532,108.618 B.5@55.532,110.148
PAD08: B.4 P1.8 | length 27.7
  Bottom Layer w1: P1.8 44.018,91.797 44.636,91.797 B.4
PAD09: A.3 B.3 P1.9 | length 42.5
  Bottom Layer w1: P1.9 49.931,87.837 ; A.3 49.911,87.817 49.931,87.837 ; B.3 50.038,92.199 50.038,87.944 49.931,87.837
PAD10: A.5 P1.10 | length 24.1
  Bottom Layer w1: P1.10 44.196,83.877 46.275,81.798 A.5
PAD11: A.8 C3.2 E.3 E.5 P1.11 P1.12 | length 86.5
  Top Layer w1: C3.2 59.309,61.341 67.564,69.596 67.564,74.606 A.8
  Bottom Layer w1: P1.12 P1.11 40.479,79.917 49.657,70.739 67.564,70.739 ; A.8 67.619,70.794 67.564,70.739 ; E.3 E.5 67.564,70.739
PAD12: E.2 N1.8 P1.13 | length 90.3
  Top Layer w1: v1(78.486,68.199) 78.486,56.642 N1.8
  Bottom Layer w1: P1.13 42.049,71.997 45.974,68.072 89.789,68.072 97.536,75.819 E.2
PAD13: G1.11 P1.14 | length 102.2
  Bottom Layer w1: P1.14 39.843,68.037 41.402,66.478 114.611,66.478 123.952,75.819 G1.11
PAD14: N1.13 P1.15 | length 39.4
  Bottom Layer w1: P1.15 68.511,64.077 N1.13
PAD15: D7.C N4.1 P1.16 | length 187.2
  Top Layer w0.5: v1(125.857,71.755) 158.877,71.755 162.695,75.573 162.695,83.431 161.29,84.836 158.369,84.836 156.972,86.233 156.972,100.33 158.369,101.727 158.369,112.473 ; N4.1 156.005,112.473 158.369,112.473 ; D7.C 160.733,112.473 158.369,112.473
  Bottom Layer w1: P1.16 54.945,60.117 57.531,57.531 71.247,57.531 72.898,59.182 72.898,62.357 74.93,64.389 118.364,64.389 v1@125.793,71.819
PAD16: P1.17 R34.2 R36.1 U2.4 | length 127.4
  Top Layer w0.5: v1(40.894,56.134) 40.894,28.956 46.863,22.987 61.087,22.987 67.593,29.493 67.593,29.514 67.67,29.591 U2.4 ; R36.1 R36.1@87.159,56.029 ; R34.2@91.656,56.029 R34.2
  Top Layer w1: R36.1 87.462,56.066 87.537,55.991 89.154,55.991 ; v1(89.154,51.689) 89.154,55.991 ; R34.2 89.154,55.991
  Bottom Layer w1: P1.17 50.904,56.157 55.245,51.816 89.027,51.816 v1(89.154,51.689)
PAD17: H2.13 H3.13 N2.4 P1.18 R30.2 U2.7 | length 126.9
  Top Layer w0.5: U2.7 76.835,32.131 79.777,35.073 H2.13 ; H3.13 103.124,35.306 109.982,28.448 117.348,28.448 119.999,31.099 R30.2 123.428,31.099 124.333,32.004 124.333,37.592 N2.4
  Bottom Layer w0.5: P1.18 32.512,52.451 41.783,52.451 43.878,50.356 69.659,50.356 71.755,48.26 71.755,44.069 74.295,41.529 79.756,41.529 ; H2.13 79.756,38.033 79.756,41.529 ; H3.13 99.441,41.529 79.756,41.529
PAD18: H2.8 P1.19 | length 38.4
  Bottom Layer w0.5: P1.19 P1.19@32.362,48.133
  Bottom Layer w1: P1.19@32.362,48.133 67.116,48.133 H2.8
PAD19: H1.4 P1.20 | length 26.3
  Bottom Layer w1: P1.20 39.924,44.277 41.663,42.538 53.421,42.538 H1.4
PAD20: D13.C H2.9 P1.21 | length 65.1
  Top Layer w0.5: H2.9 69.617,39.772 71.374,41.529 81.153,41.529 83.693,38.989 83.693,32.766 84.074,32.385 D13.C
  Bottom Layer w1: P1.21 67.312,40.317 H2.9
PIN_Converter: D5.A M.6 | length 24.2
  Bottom Layer w0.5: D5.A 51.306,124.589 52.705,123.19 64.344,123.19 66.548,120.986 M.6
VCC: C2.2 D6.C H.4 H.8 R11.1 | length 29.8
  Top Layer w0.5: H.4 94.361,112.268 96.012,110.617 100.457,110.617 101.6,111.76 101.6,115.189 ; H.8 101.6,116.078 ; R11.1 101.6,117.822 ; C2.2 101.632,115.157 101.6,115.189 ; D6.C 106.156,118.115 105.863,117.822 101.6,117.822 ; 101.6,115.189 101.6,116.078 ; 101.6,116.078 101.6,117.822
pads on no net: A.1 A.2 B.2 CN3.5 F1.5 F1.7 F2.4 F2.6 G1.6 G1.9 G2.6 G2.9 G2.11 G2.13 H1.11 H2.11 H3.11 H4.6 H4.11 H.5 H.7 M.8 M.9 M.13 M.14 N1.6 N2.6 N2.11 N4.6 N4.9 P1.1 U2.1 U2.5 U2.8

## Polygon pours and split planes (outlines as drawn)
GND on Bottom Layer "GND_L02_P000" (solid, remove dead copper, pour order 0): 38.862,46.55 38.862,27.386 44.894,21.353 165.862,20.955 165.862,36.449 165.744,132.588 83.566,132.588 83.566,103.558 154.432,103.558 154.432,47.197

## Keep-outs
Keep-Out Layer:
  lines w0.5: 26.924,33.401 26.924,34.163 26.924,122.828 36.83,122.828 36.83,127.254 43.307,133.731 166.37,133.731 166.37,19.749 44.894,19.749 36.703,27.94 36.703,33.401 26.924,33.401

## Text inside footprints (layer, text, board x,y; h text height)
CN1: Top Overlay "1" at 139.827,120.777 h0.76; Top Overlay "5" at 154.305,120.523 h0.76
CN2: Top Overlay "1" at 137.287,29.591 h0.76; Top Overlay "6" at 154.305,29.464 h0.76
CN3: Top Overlay "1" at 72.39,95.758 h0.76; Top Overlay "10" at 99.822,95.758 h0.76
G1: Top Overlay "N40782C" at 133.698,82.202 h1.2 r90
G2: Top Overlay "N40782C" at 157.828,81.821 h1.2 r90
P1: Top Overlay "1" at 40.546,120.439 h0.8